# Altium PCB surface.PcbDoc
Units mm, origin at the board's own origin, x right, y up, seen from the top; angles counter-clockwise.
Board outline 35 x 27 mm, 4 copper layers (Top Layer, GND, VCC, Bottom Layer), stack 0.778 mm thick; 35 components, 37 nets, 144 pads, 29 vias.
Unrouted connection lines stored in the file: 1.
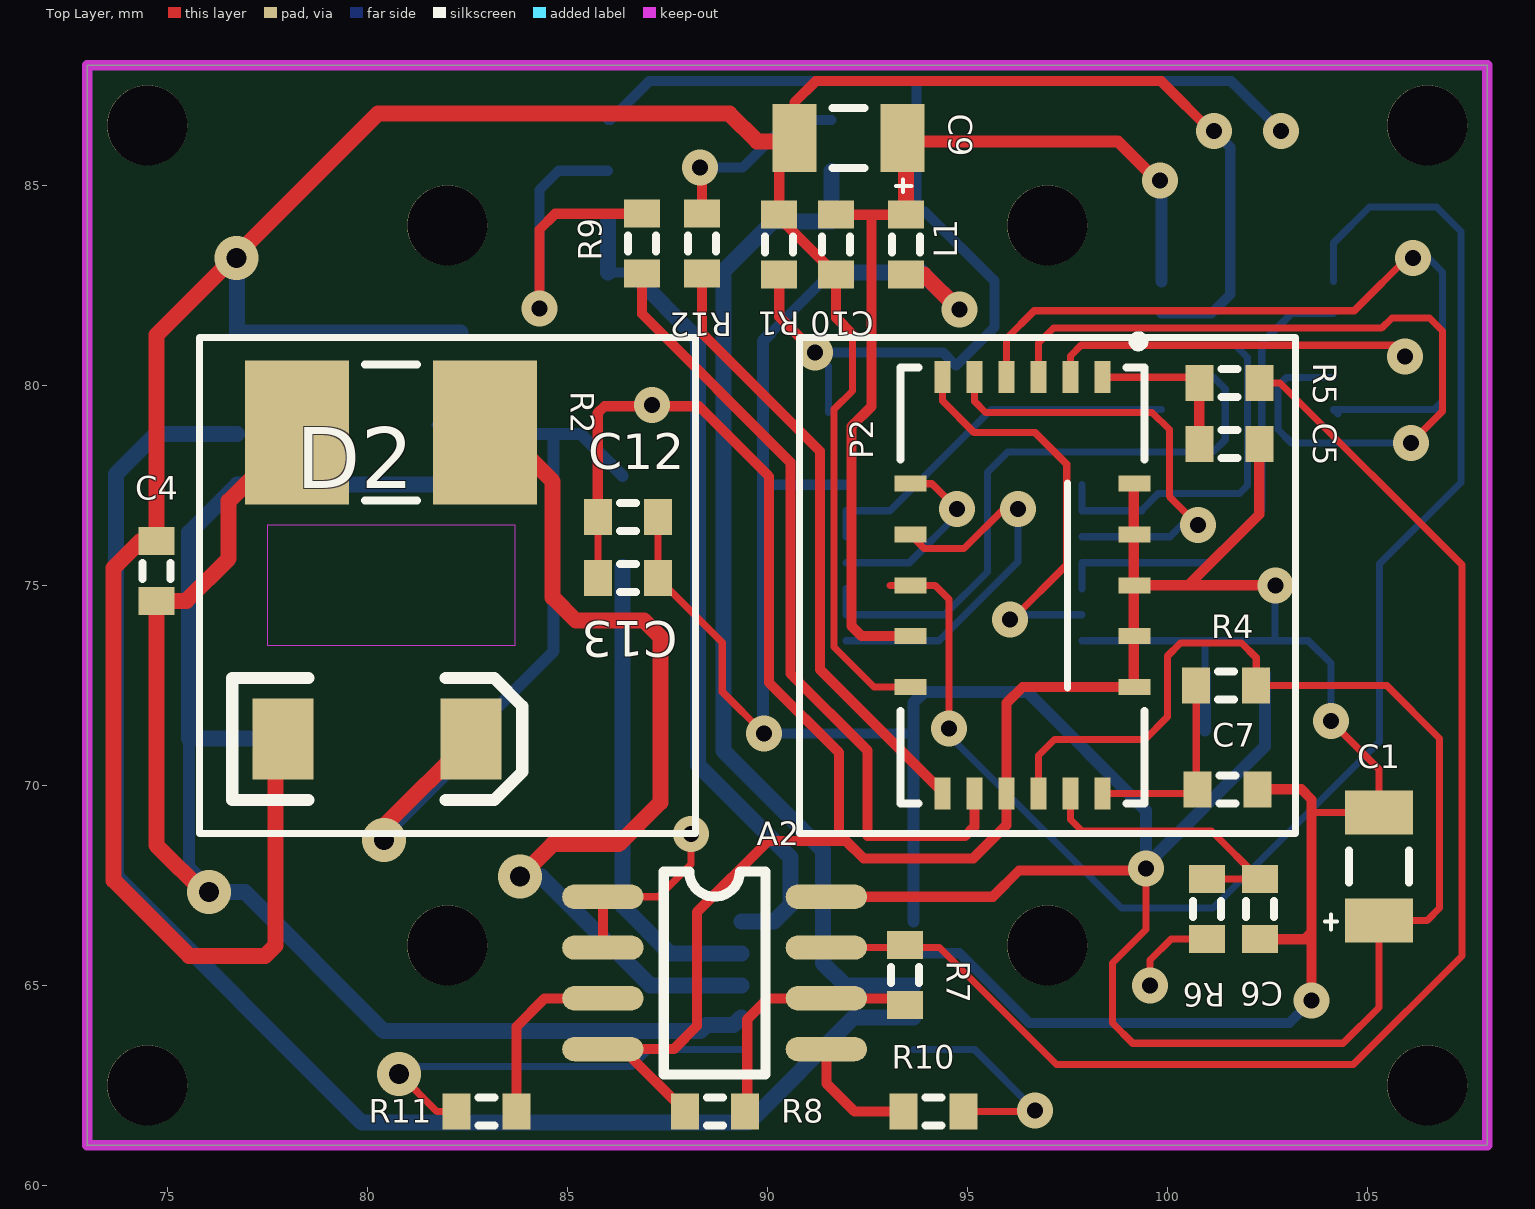
[diagram p0: Top Layer view]
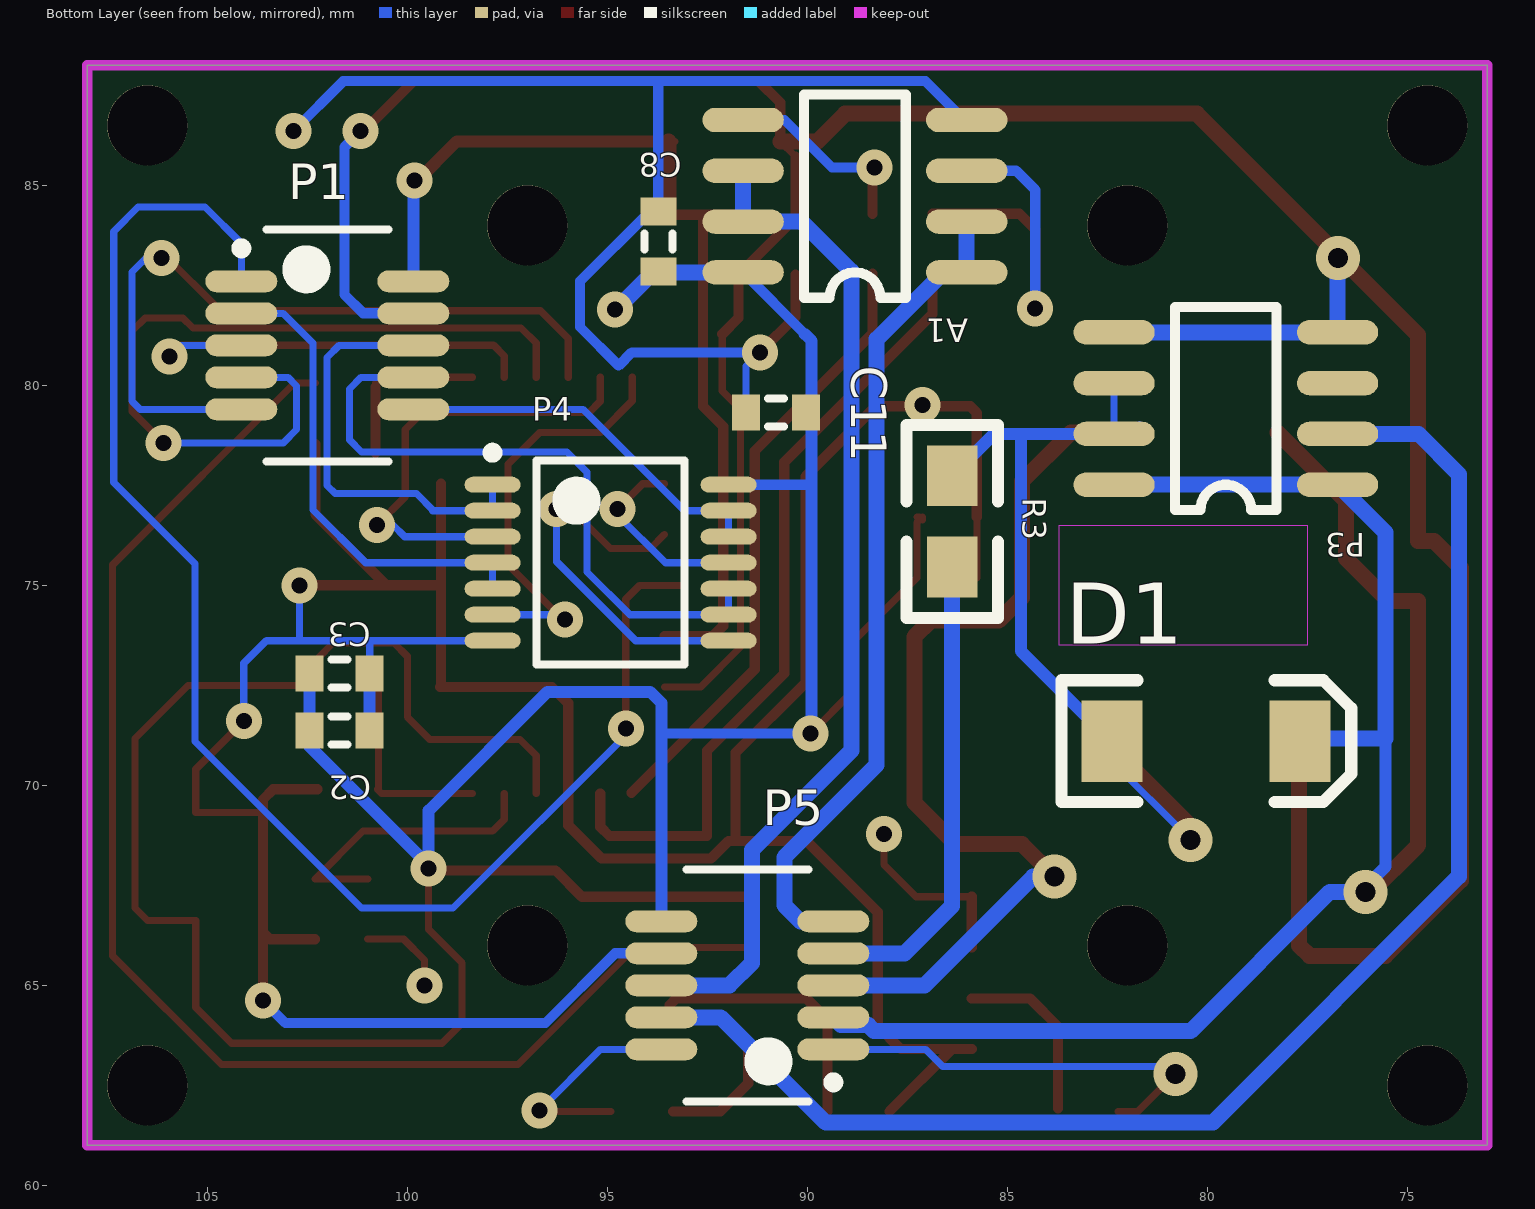
[diagram p1: Bottom Layer view, seen from below]
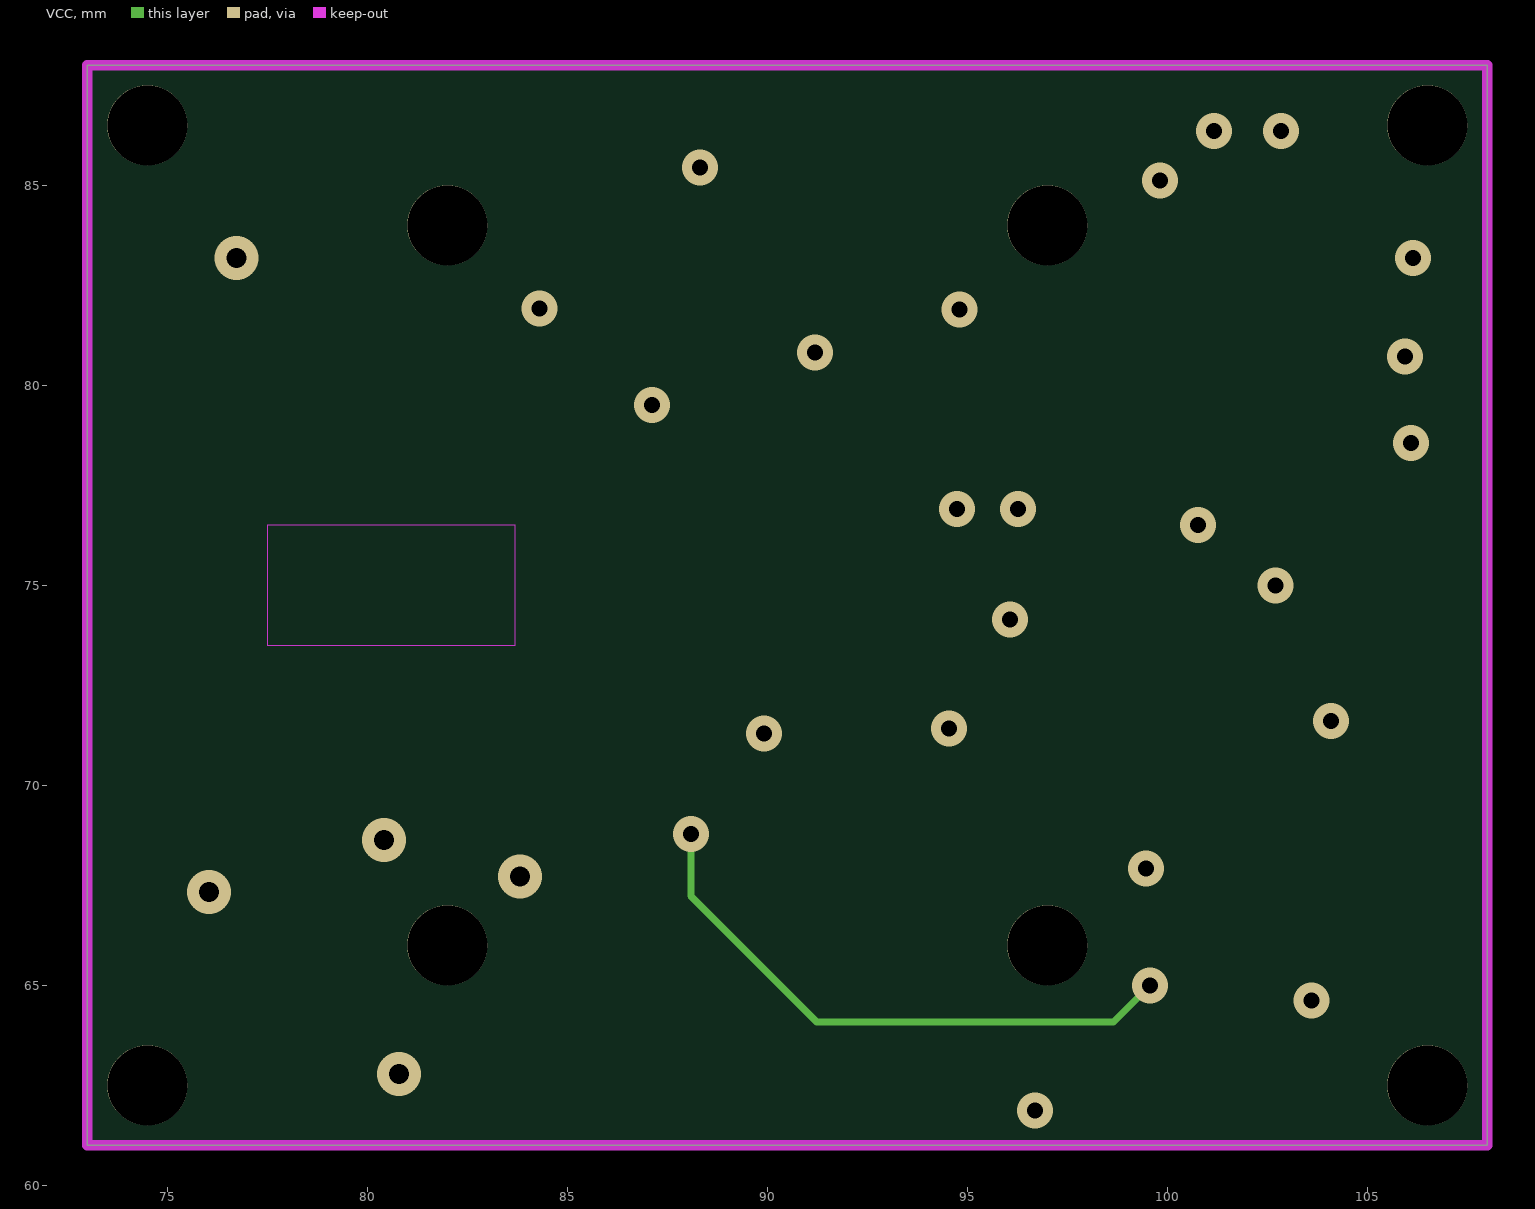
[diagram p2: VCC]

## Layer stack, top to bottom
Top Solder: solder mask 0.0102, Solder Resist, Dk 3.5
Top Layer: signal copper 0.0356
Dielectric 1: core 0.254, FR-4, Dk 4.2
GND: signal copper 0.036
Dielectric 3: prepreg 0.127, Dk 4.2
VCC: signal copper 0.036
Dielectric 2: core 0.254, Dk 4.2
Bottom Layer: signal copper 0.0356
Bottom Solder: solder mask 0.0102, Solder Resist, Dk 3.5

## Board outline
73,61 73,88 108,88 108,61

## Design rules (kind name [scope] priority, off if disabled: settings)
Clearance [All] p1: gap=0.127
PolygonConnect [All] p1: connectstyle=Relief reliefconductorwidth=0.254 reliefentries=4 polygonreliefangle="90 Angle" airgapwidth=0.254
RoutingVias [All] p1: holewidth=0.711 width=1.27 viastyle="Through Hole" minholewidth=0.711 minwidth=1.27 maxholewidth=0.711 maxwidth=1.27
SolderMaskExpansion [All] p1: expansion=0.102
Width [All] p1: maxlimit=0.4 minlimit=0.178 preferedwidth=0.178
30 further rules are at their usual default settings.

## Components (designator, comment, footprint, x,y, rotation, side; value= is the part's Value field where it differs from the comment)
A1 "AD8028" so-8 86.004,82.829 r0 bottom
A2 "AD8028" so-8 85.877,67.208 r0 top
C1 "tan" C1206+ 105.283,67.97 r180 top
C2 "ceramic" J1-0603 101.69,71.374 r0 bottom
C3 "ceramic" J1-0603 101.69,72.796 r0 bottom
C4 "Ceramic" J1-0603 74.727,75.362 r270 top
C5 "ceramic" J1-0603 101.549,78.537 r180 top
C6 "ceramic" J1-0603 102.311,66.904 r90 top
C7 "ceramic" J1-0603 101.498,69.901 r180 top
C8 "ceramic" J1-0603 93.726,83.591 r270 bottom
C9 "tan" C1206+ 92.024,86.182 r270 top
C10 "ceramic" J1-0603 91.719,83.515 r90 top
C11 "ceramic" J1-0603 90.78,79.324 r180 bottom
C12 "ceramic" J1-0603 86.512,76.708 r180 top
C13 "ceramic" J1-0603 86.512,75.184 r0 top
D1 "Diode" DIODE 80.162,71.095 r90 bottom
D2 "Diode" DIODE 80.112,71.145 r90 top
L1 "Ferrite Bead" J1-0603 93.472,83.515 r270 top
P1 "header10" btb10p_f 102,81 r180 bottom
P2 "hamamatsu S11961" s11961 97.5,75 r270 top
P3 "EL7104" so-8 76.733,77.521 r0 bottom
P4 "74hct08" TSOP14 94.92,75.565 r180 bottom
P5 "header10" btb10p_f 91.5,65 r0 bottom
R1 "isolation resistor" J1-0603 90.297,83.515 r270 top
R2 "Charge Resistor" 2512 80.594,78.816 r0 top
R3 "Ferrite Bead" 0805 86.385,77.749 r270 bottom
R4 "Res1" J1-0603 101.473,72.492 r0 top
R5 "Res1" J1-0603 101.549,80.061 r180 top
R6 "Res1" J1-0603 100.99,66.904 r90 top
R7 "Res1" J1-0603 93.447,65.253 r90 top
R8 "Res1" J1-0603 88.697,61.849 r0 top
R9 "Res1" J1-0603 86.868,83.541 r90 top
R10 "Res1" J1-0603 94.158,61.849 r0 top
R11 "Res1" J1-0603 82.982,61.849 r180 top
R12 "Res1" J1-0603 88.367,83.541 r90 top

## Footprints (in the part's own frame and the unit in brackets; to place one, negate y for a bottom-side part, rotate by r counter-clockwise, add the part's x,y. Pads: shape width x height; smd on the part's side, far side on the other; paste and mask are expansions set on the pad)
0805 [mil]
  rect 60x50 smd: 1(0.41,0.24) 2(90.41,0.24)
  silkscreen extent -50,-45 140,45
2512 [mm] "Chip Resistor, 2-Leads, Body 6.40x3.40mm, IPC Medium Density"
  rect 2.6x3.6 smd: 1(-2.35,0) 2(2.35,0)
  silkscreen extent -0.65,-1.7 0.65,1.7, body extent -3.3,-1.8 3.3,1.8, height 0.6
btb10p_f [mm] "molex board to board 10p, female"
  oval 1.8x0.55 smd: 1(-2.15,1.6) 2(-2.15,0.8) 3(-2.15,0) 4(-2.15,-0.8) 5(-2.15,-1.6) 6(2.15,-1.6) 7(2.15,-0.8) 8(2.15,0) 9(2.15,0.8) 10(2.15,1.6)
  silkscreen extent -2.28,-2.9 1.52,2.9, body extent -2.05,-2.9 2.05,2.9, height 0.1
C1206+ [mm]
  rect 1.7x1.1 smd: 1(-0.005,1.352) 2(-0.005,-1.348)
  silkscreen extent -0.76,-0.4 1.35,1.57, body extent -0.91,-1.7 0.89,1.7, height 1.3
DIODE [mil]
  rect 80x60 smd: 1(0.41,87.24) 2(0.41,-97.76)
  silkscreen extent -60,-148 60,137
J1-0603 [mm] "Chip Resistor, Body 1.6x0.8mm, IPC High Density"
  rect 0.7x0.9 smd: 1(-0.75,0) 2(0.75,0)
  silkscreen extent -0.2,-0.35 0.2,0.35, body extent -0.85,-0.48 0.85,0.48, height 0.9
s11961 [mm]
  rect 0.8x0.4 smd: 1(-5.202,0.877) 2(-5.202,0.077) 3(-5.202,-0.723) 4(-5.202,-1.523) 5(-5.202,-2.323) 6(-5.202,-3.123) 12(5.202,-3.123) 13(5.202,-2.323) 14(5.202,-1.523) 15(5.202,-0.723) 16(5.202,0.077) 17(5.202,0.877)
  rect 0.4x0.8 smd: 7(-2.54,-3.925) 8(-1.27,-3.925) 9(0,-3.925) 10(1.27,-3.925) 11(2.54,-3.925) 18(2.54,1.679) 19(1.27,1.679) 20(0,1.679) 21(-1.27,1.679) 22(-2.54,1.679)
  silkscreen extent -6.22,-4.17 5.45,1.93, body extent -5.3,-4 5.3,1.8, height 2
so-8 [mil]
  oval 80x24 smd: 1(0.41,0.24) 2(0.41,-49.76) 3(0.41,-99.76) 4(0.41,-149.76) 5(220.41,-149.76) 6(220.41,-99.76) 7(220.41,-49.76) 8(220.41,0.24)
  silkscreen extent 60,-175 160,25
TSOP14 [mm] "TSOP, 14-Leads, Body 5.00x4.40mm, Pitch 0.65mm, IPC Medium Density"
  oval 1.4x0.4 smd: 1(-2.95,1.95) 2(-2.95,1.3) 3(-2.95,0.65) 4(-2.95,0) 5(-2.95,-0.65) 6(-2.95,-1.3) 7(-2.95,-1.95) 8(2.95,-1.95) 9(2.95,-1.3) 10(2.95,-0.65) 11(2.95,0) 12(2.95,0.65) 13(2.95,1.3) 14(2.95,1.95)
  silkscreen extent -3.08,-2.55 1.85,2.87, body extent -2.25,-2.55 2.25,2.55, height 1.2

## Part data
C1 C9: library part "Cap Pol3", "Polarized Capacitor (Surface Mount)"
C2 C3 C4 C5 C6 C7 C8 C10 C11 C12 C13: library part Cap, "Capacitor"
D1 D2: "Default Diode"
L1: library part Inductor, "Inductor"
P2: library part S11961
P4: library part 74alvc08
R1 R2 R3: library part Res2, "Resistor"
R4 R5 R6 R7 R8 R9 R10 R11 R12: "Resistor"

## Free pads (board coordinates)
  round 2 hole 2: 2(74.5,62.5) 2(74.5,86.5) 2(82,66) 2(82,84) 2(97,66) 2(97,84) 2(106.5,62.5) 2(106.5,86.5)

## Via types
v1: diameter 0.9, hole 0.4, Top Layer to Bottom Layer, 24 vias
v2: diameter 1.1, hole 0.5, Top Layer to Bottom Layer, 5 vias

## Nets (pads, with @x,y where several pads share a name; then routed paths per layer and width w, separated by ;. In a path a pad name is that pad's centre, name@x,y a point inside that pad or via, vN(x,y) a via of type N, cw(c..) or ccw(c..) an arc to the next point about the centre after c; other vN are vias at no path point)
1.0IN: A2.3 R11.1 | length 4.5
  Top Layer w0.254: R11.1@83.732,61.925 83.732,63.971 84.436,64.675 A2.3
1.0V: C6.2 P2.16 R6.2 | length 7.3
  Top Layer w0.178: P2.16 97.577,69.149 97.866,68.859 101.105,68.859 C6.2 R6.2
4.25IN: A2.5 R10.1 | length 3
  Top Layer w0.254: A2.5 91.476,62.55 92.177,61.849 R10.1@93.357,61.849
4.25V: C5.2 P2.1 R5.2 | length 4.1
  Top Layer w0.178: P2.1 100.658,80.202 R5.2
  Top Layer w0.254: C5.2@100.799,78.308 C5.2 R5.2@100.799,79.959
15V: C4.2 D1.2 P3.1 P3.8 P5.2 R2.1 | length 47.6
  Top Layer w0.4: v2(76.048,67.335) 75.971,67.259 74.727,68.504 C4.2 75.475,74.612 76.53,75.667 76.53,77.102 R2.1
  Bottom Layer w0.178: D1.2@77.614,71.171 D1.2
  Bottom Layer w0.3: 75.544,71.171 75.544,67.966 v2@76.175,67.335
  Bottom Layer w0.4: v2(76.048,67.335) 76.937,67.335 80.416,63.856 88.329,63.856 88.476,64.002 89.152,64.002 P5.2 ; D1.2@77.614,71.171 75.544,71.171 75.544,76.315 P3.1 P3.8
+5: C9.1 C10.2 L1.1 P1.10 P2.10 | length 25
  Top Layer w0.178: C9.1@93.309,86.1 C9.1@93.472,86.1
  Top Layer w0.254: C10.2 L1.1@93.447,84.265 ; 92.608,84.226 92.608,79.477 92.1,78.969 92.1,73.99 92.361,73.73 P2.10
  Top Layer w0.3: C9.1@93.472,86.1 98.761,86.1 v1@99.797,85.065
  Top Layer w0.4: L1.1 C9.1@93.472,86.1
  Bottom Layer w0.3: P1.10 v1@99.85,85.087
  other v1: 99.822,85.115
DCLCK: P1.1 P2.9 | length 37.5
  Top Layer w0.178: 93.075,75 94.189,75 94.539,74.651 v1(94.539,71.425)
  Bottom Layer w0.178: v1@94.539,71.247 98.857,66.929 101.143,66.929 105.308,71.095 105.308,75.54 107.34,77.572 107.34,83.845 106.731,84.455 105.054,84.455 104.15,83.551 P1.1
GND: C4.1 C9.2 C10.1 D2.1 P1.9 P2.11 P3.4 P3.5 R1.1 | length 85
  Top Layer w0.178: C4.1@74.498,76.112 C4.1@74.625,76.112 ; C9.2@90.297,85.72 C9.2@90.676,86.1 ; 92.126,81.28 92.126,79.858 91.669,79.4 91.669,73.457 92.665,72.46 P2.11
  Top Layer w0.254: C9.2@90.297,85.72 R1.1 90.297,84.188 C10.1 91.719,81.686 92.126,81.28 ; C9.2 90.676,87.07 91.211,87.605 99.847,87.605 v1@101.13,86.322
  Top Layer w0.4: D2.1@77.703,71.145 77.703,65.994 77.445,65.735 75.547,65.735 73.66,67.623 73.66,75.438 74.334,76.112 C4.1 74.727,81.255 80.264,86.792 89.052,86.792 89.744,86.1 C9.2@90.676,86.1
  Bottom Layer w0.178: v2@76.744,83.297 v2@76.784,83.337
  Bottom Layer w0.254: P1.9 101.104,81.8 101.575,82.271 101.575,85.954 v1(101.168,86.36)
  Bottom Layer w0.4: v2@76.744,83.297 P3.4 P3.5
  other v2: 76.733,83.185
GNDA: A1.4 A2.4 C1.2 C2.1 C3.1 C5.1 C6.1 C7.1 C8.1 C11.1 C12.2 C13.1 P2.14 P2.18 P2.19 P2.20 P2.21 P2.22 P4.7 P5.7 R1.2 R8.1 | length 124.8
  Top Layer w0.178: C13.1 C12.2 ; v1@103.607,64.948 103.607,66.326 ; 103.607,69.317 103.608,69.318 C1.2 105.288,70.404 v1(104.089,71.603)
  Top Layer w0.254: C12.2 85.762,79.311 85.928,79.477 88.29,79.477 90.043,77.724 90.043,72.568 91.796,70.815 91.796,68.605 ; A2.4 A2.4@86.391,63.405 ; R8.1 A2.4@86.391,63.405 ; R1.2 90.297,81.712 v1(91.186,80.823) ; P2.18@99.162,72.46 P2.22@99.162,77.54 ; P2.18 96.387,72.46 95.977,72.05 95.977,69.002 95.148,68.174 92.405,68.174 91.973,68.605 90.018,68.605 88.24,66.827 88.24,63.983 87.662,63.405 A2.4@86.391,63.405 ; P2.20 100.527,75 ; C7.1 103.353,69.901 103.607,69.647 103.607,69.317 v1(103.607,64.618) ; C5.1 102.299,76.772 100.527,75 ; C6.1 103.434,66.154 103.607,66.326 ; v1(102.698,75) 100.527,75
  Bottom Layer w0.178: v1(91.186,80.823) 91.53,80.479 C11.1 ; P4.7 100.94,73.615 ; C3.1 100.94,73.615 ; v1(102.698,75) 102.692,74.994 102.692,73.615 ; v1(104.089,71.603) 104.089,73.05 103.525,73.615 102.692,73.615 ; 100.94,73.615 102.692,73.615
  Bottom Layer w0.254: A1.4 86.074,86.633 87.046,87.605 101.6,87.605 v1(102.845,86.36) ; v1(91.186,80.823) 94.386,80.823 94.717,80.493 95.682,81.458 95.682,82.601 93.941,84.341 C8.1 93.726,87.528 ; P5.7 94.804,65.8 96.545,64.059 103.048,64.059 v1(103.607,64.618)
  Bottom Layer w0.3: C2.1 C3.1
  other v1: 87.122,79.502
MCLK: P2.7 P4.11 | length 4.8
  Top Layer w0.178: P2.7 94.113,77.54 v1(94.742,76.911)
  Bottom Layer w0.178: P4.11 93.548,75.565 94.742,76.759 v1(94.742,76.911)
MCLOCK: P1.6 P4.12 P4.13 | length 9.6
  Bottom Layer w0.178: P4.12 P4.13 93.07,76.865 95.605,79.4 P1.6
NetA1_3: A1.3 R9.2 | length 9.6
  Top Layer w0.254: v1(84.303,81.915) 84.303,83.896 84.697,84.291 R9.2
  Bottom Layer w0.254: v1(84.303,81.915) 84.303,84.887 84.779,85.363 A1.3
NetA1_5: A1.5 R12.2 | length 5
  Top Layer w0.254: v1(88.316,85.446) 88.367,85.395 R12.2
  Bottom Layer w0.254: v1(88.316,85.446) 89.383,85.446 90.57,86.633 A1.5
NetA2_1: A2.1 A2.2 R6.1 | length 21.6
  Top Layer w0.178: A2.1 87.281,67.215 88.087,68.021 v1(88.087,68.783) ; v1(99.568,64.999) 99.568,65.634 100.088,66.154 R6.1
  Top Layer w0.254: A2.2 A2.1
  VCC w0.178: v1(88.087,68.783) 88.087,67.234 91.237,64.084 98.654,64.084 v1(99.568,64.999)
NetA2_6: A2.6 R7.1 R8.2 | length 6.5
  Top Layer w0.254: R8.2@89.498,61.849 89.498,64.148 90.024,64.675 A2.6 93.275,64.675 R7.1
NetA2_7: A2.7 R5.1 R7.2 | length 35
  Top Layer w0.178: A2.7 94.304,65.945 97.231,63.017 104.648,63.017 107.366,65.735 107.366,75.514 102.819,80.061 R5.1
NetD1_1: D1.1 D2.2 P3.6 P3.7 R3.1 | length 21.4
  Top Layer w0.178: v2(80.416,68.631) v2@80.416,68.978
  Top Layer w0.4: v2@80.416,68.978 D2.2
  Bottom Layer w0.178: v2(80.416,68.631) 82.494,70.709 D1.1@82.494,71.171 ; P3.7@81.697,79.013 P3.7@81.97,78.74 ; P3.7 P3.6
  Bottom Layer w0.3: P3.7 84.658,78.785 ; D1.1@82.499,71.196 84.658,73.355 84.658,78.785 ; R3.1 85.334,78.785 84.658,78.785
NetP5_1: P5.1 R11.2 | length 10.6
  Top Layer w0.178: v2(80.797,62.789) 81.737,61.849 R11.2
  Bottom Layer w0.178: v2(80.797,62.789) 80.975,62.967 86.614,62.967 87.047,63.4 P5.1
NetP5_10: P5.10 R10.2 | length 5.5
  Top Layer w0.178: R10.2 96.672,61.849 v1(96.698,61.874)
  Bottom Layer w0.178: P5.10 95.172,63.4 v1(96.698,61.874)
P_HIS: P2.6 P4.6 | length 10.7
  Top Layer w0.178: P2.6 94.377,79.613 95.174,78.816 96.698,78.816 97.485,78.029 97.485,75.514 v1@96.114,74.143
  Bottom Layer w0.178: v1(96.063,74.143) 96.185,74.265 P4.6
P_RES: P2.5 P4.3 | length 11.5
  Top Layer w0.178: P2.5 95.177,79.6 95.453,79.324 99.619,79.324 100.051,78.892 100.051,77.216 v1(100.762,76.505)
  Bottom Layer w0.178: P4.3 100.066,76.215 100.355,76.505 v1(100.762,76.505)
P_RESET: P1.8 P4.1 P4.2 | length 10.6
  Bottom Layer w0.178: P4.1 P4.2 99.369,76.865 ; 99.339,76.86 99.771,77.292 101.803,77.292 102.006,77.495 102.006,80.696 101.702,81 P1.8
P_SAMPLE: P1.2 P4.4 P4.5 | length 12
  Bottom Layer w0.178: P4.5 P4.4 101.041,75.565 102.362,76.886 102.362,81.051 103.111,81.8 P1.2
PULSE: P3.2 P5.9 | length 38.2
  Bottom Layer w0.4: P3.2 74.721,78.785 73.711,77.775 73.711,67.723 79.864,61.57 89.535,61.57 92.165,64.2 P5.9 92.546,64.2
R_TRIG: P1.7 P4.9 P4.10 | length 16.4
  Bottom Layer w0.178: P4.10 P4.9 94.433,74.265 95.504,75.336 95.504,77.826 96.012,78.334 101.143,78.334 101.448,78.638 101.448,79.908 101.156,80.2 P1.7
TEST_D: P5.3 R2.2 | length 23.3
  Top Layer w0.4: R2.2 83.414,78.816 84.633,77.597 84.633,74.701 85.217,74.117 86.919,74.117 87.325,73.711 87.325,69.571 86.284,68.529 84.633,68.529 v2(83.82,67.716)
  Bottom Layer w0.4: v2(83.82,67.716) 84.353,67.716 87.07,65 P5.3
TEST_G: P5.4 R3.2 | length 11.9
  Bottom Layer w0.4: R3.2 86.379,66.986 87.565,65.8 P5.4
TRIG: P2.8 P4.8 | length 10.5
  Top Layer w0.178: P2.8 93.924,75.921 94.92,75.921 95.91,76.911 v1(96.266,76.911)
  Bottom Layer w0.178: P4.8 94.291,73.615 96.266,75.59 v1(96.266,76.911) 96.266,76.048
VDDA: A1.8 A2.8 C1.1 C2.2 C3.2 C8.2 C11.2 C12.1 C13.2 L1.2 P2.15 P4.14 P5.6 R4.2 | length 92.8
  Top Layer w0.178: C12.1 87.198,76.708 C12.1@87.16,76.67 ; v1(89.916,71.298) 88.875,72.339 88.875,73.572 C13.2 87.262,76.568 C12.1@87.16,76.67 ; v1@89.98,71.158 v1@89.98,71.488 ; 96.277,67.883 96.291,67.869 ; P2.15 96.777,70.742 97.18,71.145 99.441,71.145 100,71.704 100,73.228 100.33,73.558 101.854,73.558 102.223,73.189 R4.2 105.486,72.492 106.807,71.171 106.807,66.929 106.496,66.618 C1.1 105.288,64.445 104.394,63.551 99.136,63.551 98.628,64.059 98.628,65.557 99.466,66.396 v1(99.466,67.92) ; C12.1@87.16,76.67 87.122,76.632 87.122,76.708 C12.1@87.16,76.67
  Top Layer w0.254: A2.8 95.637,67.215 96.291,67.869 99.416,67.869 v1(99.466,67.92)
  Top Layer w0.4: L1.2 93.917,82.765 94.793,81.89 v1(94.805,81.89)
  Bottom Layer w0.178: 93.625,71.272 93.65,71.298
  Bottom Layer w0.254: v1@89.891,71.298 93.599,71.298 93.625,71.272 ; 89.941,77.515 P4.14 ; 90.068,81.289 A1.8
  Bottom Layer w0.3: v1@89.891,71.298 89.891,81.111 90.068,81.289 ; P5.6 93.65,71.298 93.65,72.06 93.929,72.339 96.495,72.339 99.466,69.367 v1@99.466,67.996 ; v1(99.466,67.92) v1@99.466,67.996 ; C3.2 C2.2 102.44,70.969 v1@99.466,67.996
  Bottom Layer w0.4: A1.8 C8.2@93.708,82.823 ; C8.2 93.841,82.841 94.793,81.89 v1(94.805,81.89)
VOUT1: P2.13 R9.1 | length 20
  Top Layer w0.254: R9.1 86.868,81.788 90.576,78.08 90.576,72.796 92.507,70.866 92.507,68.732 94.945,68.732 95.177,68.964 P2.13
VOUT1_BUF: A1.1 A1.2 P5.5 | length 20.7
  Bottom Layer w0.254: A1.1 A1.1@86.595,82.823
  Bottom Layer w0.4: A1.1 A1.2 ; A1.1@86.595,82.823 88.265,81.153 88.265,70.51 90.576,68.199 90.576,67.005 90.171,66.6 P5.5
VOUT2: P2.12 R12.1 | length 15.5
  Top Layer w0.254: R12.1 88.367,81.305 91.313,78.359 91.313,72.898 P2.12@94.395,69.816
VOUT2_BUF: A1.6 A1.7 P5.8 | length 25.3
  Bottom Layer w0.4: A1.6 A1.7 90.138,84.093 88.9,82.855 88.9,70.866 91.389,68.377 91.389,65.557 91.947,65 P5.8
VSF: C7.2 P2.17 R4.1 | length 5
  Top Layer w0.178: P2.17 100.645,69.798 C7.2 100.723,69.926 R4.1
VTX1: P1.5 P2.4 | length 19.1
  Top Layer w0.178: P2.4 95.977,81.169 96.672,81.864 104.673,81.864 v1@106.096,83.287
  Bottom Layer w0.178: P1.5@104.267,79.283 P1.5 106.68,79.4 106.883,79.604 106.883,82.829 106.426,83.287 v1@106.121,83.287
  other v1: 106.147,83.185
VTX2: P1.4 P2.3 | length 20.8
  Top Layer w0.178: P2.3 96.777,81.054 97.155,81.432 105.359,81.432 105.613,81.686 106.553,81.686 106.883,81.356 106.883,79.35 v1(106.096,78.562) v1@106.401,78.562
  Bottom Layer w0.178: P1.4 102.984,80.2 102.768,79.985 102.768,78.892 103.099,78.562 v1(106.096,78.562)
VTX3: P1.3 P2.2 | length 10.7
  Top Layer w0.178: P2.2 97.577,80.737 97.841,81.001 v1@105.689,81.001
  Bottom Layer w0.178: P1.3 105.665,81 v1(105.943,80.721)
pads on no net: P3.3

## Keep-outs
Keep-Out Layer:
  rectangle: 77.5,73.5 83.7,76.5
  lines w0.254: 73,61 73,88 108,88 108,61 73,61

## Other copper
Top Layer:
  text "JSK LASER" at 117.475,68.275 h1.52 r90
  text "VERSION2.4" at 119.863,68.174 h1.2 r90

## Silkscreen, mask and mechanical layers (free items; w line width, h text height)
Top Overlay:
  lines w0.178: 75.8,68.8 88.2,68.8 88.2,81.2 75.8,81.2 75.8,68.8 ; 90.8,68.8 90.8,81.2 103.2,81.2 103.2,68.8 90.8,68.8
Bottom Overlay:
  text "CHEN" at 114.198,71.095 h1.52 r90
  text "DESIGNED by" at 112.776,67.285 h1.52 r90

## Dimensions
73,88 to 108,88 on Top Layer
73,88 to 73,61 on Top Layer